# EAGLE board first designbr (EAGLE 7.5.0)
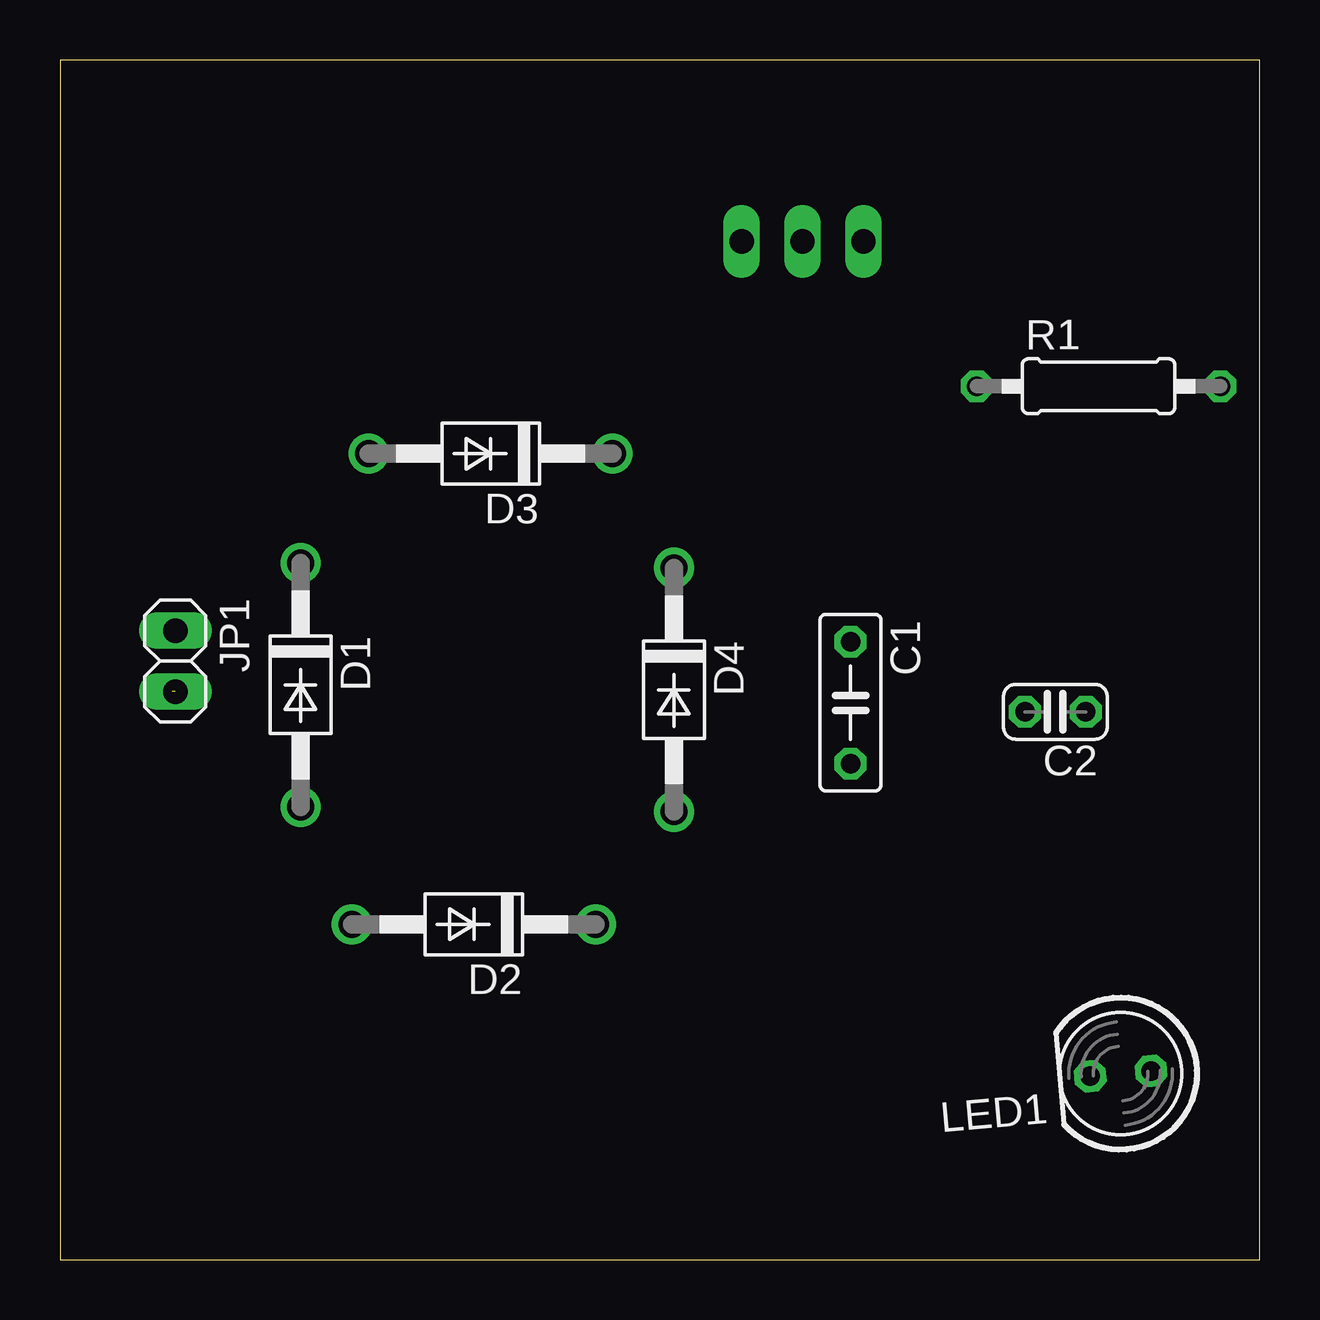
[diagram p0: board, top side]
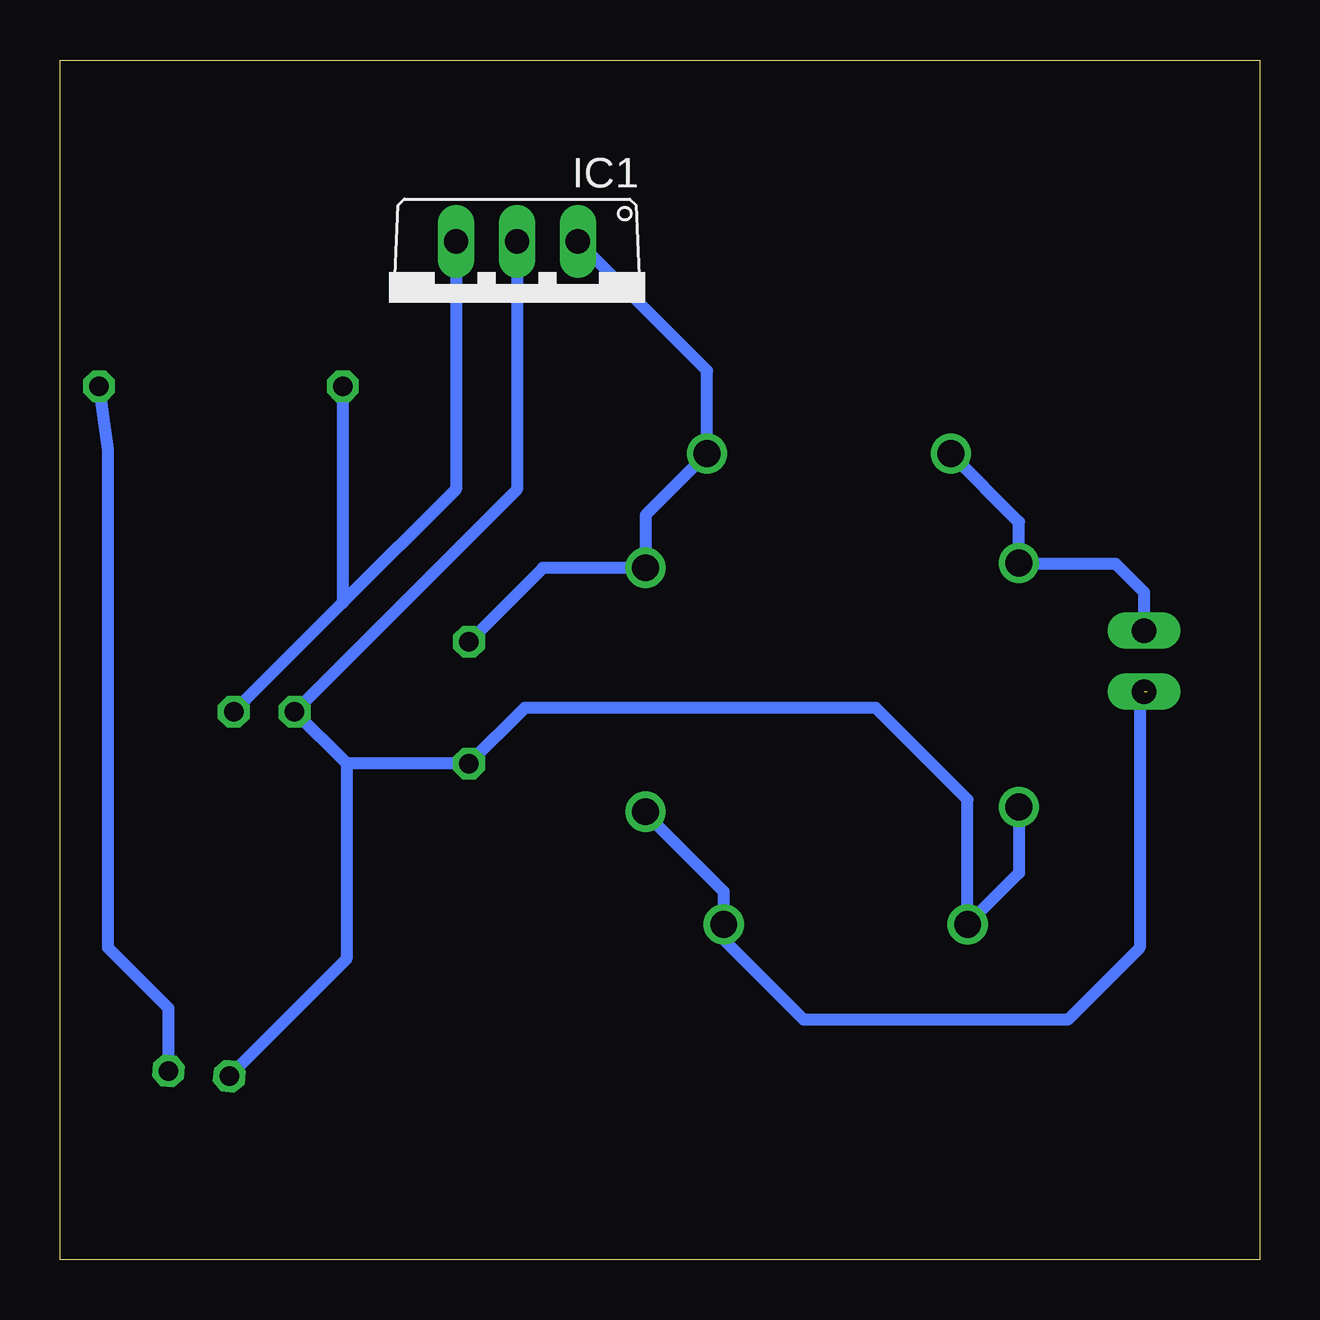
[diagram p1: board, bottom side, seen from below]

Size 50 x 50 mm. Coordinates in mm from the lower left corner, seen from the top.
Outline: 0,0 50,0 50,50 0,50 0,0
Copper layers (1*16): Top 0.035mm / dielectric 1.5mm / Bottom 0.035mm
Design rules "default": minimum track width 10mil, minimum drill 24mil, track to track 8mil, track to pad 8mil, pad to pad 8mil, via to via 8mil, smd to smd 8mil, copper to edge 40mil, drill to drill 8mil, minimum pad ring 10mil, minimum via ring 8mil, stop-mask expansion 4mil, vias tented up to drill 0mil, thermal gap 10mil

## Footprints (pad centres in the part's own frame; a part is rotated, then mirrored left to right if it is on the bottom)
C050-025X075 = drill 0.813 octagon: 1 -2.54,0; 2 2.54,0
C025-024X044 = drill 0.813 octagon: 1 -1.27,0; 2 1.27,0
DO41-10 = drill 1.118: A 5.08,0; C -5.08,0
TO220V = drill 1.016 long: 1 -2.54,-2.54; 2 0,-2.54; 3 2.54,-2.54
1X02 = drill 1.016 long: 1 -1.27,0; 2 1.27,0
LED5MM = drill 0.813 octagon: A -1.27,0; K 1.27,0
0207/10 = drill 0.813 octagon: 1 -5.08,0; 2 5.08,0

## Placement (x,y rotation side)
C1  470uF/25V  [C050-025X075]  32.95,23.21 270 top
C2  0.1uF  [C025-024X044]  41.49,22.83 180 top
D1  1N4004  [DO41-10]  10.03,23.95 270 top
D2  1N4004  [DO41-10]  17.25,13.97 180 top
D3  1N4004  [DO41-10]  17.95,33.59 180 top
D4  1N4004  [DO41-10]  25.59,23.75 270 top
IC1  788TV  [TO220V]  30.95,39.89 180 bottom
JP1  12V  [1X02]  4.81,24.94 270 top
LED1  blue  [LED5MM]  44.21,7.75 185 top
R1  1K  [0207/10]  43.29,36.4 0 top

## Library data of the parts
C1 C2 R1 = rcl
D1-D4 = diode
IC1 = linear
JP1 = pinhead
LED1 = led

## Nets
GND: C1.2 C2.2 D1.A D2.A IC1.2 LED1.K
N$1: D1.C D3.A JP1.1
N$2: C1.1 D3.C D4.C IC1.1
N$5: D2.C D4.A JP1.2
N$6: C2.1 IC1.3 R1.1
N$7: LED1.A R1.2

## Tracks (layer width: path | path; a pad name or v marks a point on that pad's centre or on a via)
GND
  Bottom 0.5: D1.A 10.03,16.11 D2.A 12.17,19.17 16,23 30.62,23 C1.2 38.06,20.67 | IC1.2 30.95,32.1 C2.2 38.06,20.67 | 38.06,20.67 38.06,12.52 LED1.K
N$1
  Bottom 0.5: JP1.1 4.81,27.81 6,29 10,29 D1.C 10.03,30.75 D3.A
N$2
  Bottom 0.5: IC1.1 23.03,37.05 D3.C 25.59,31.03 D4.C 29.87,28.83 C1.1
N$5  (1 unrouted)
  Bottom 0.5: 4.67,23.67 5,23.34 5,13 8,10 19,10 22.33,13.33 D2.C 22.33,15.33 26,19 25.92,19 D4.A
N$6
  Bottom 0.5: IC1.3 33.49,32.1 38.21,27.38 | C2.1 42.3,23.3 38.21,27.38 | R1.1 38.21,27.38
N$7
  Bottom 0.5: LED1.A 45.48,10.47 48,13 48,33.77 R1.2